# Altium PCB m_tas3_4layer.PcbDoc (part 1 of 2)
Units mm, origin at the board's own origin, x right, y up, seen from the top; angles counter-clockwise.
Board outline 100.71 x 81.15 mm, 4 copper layers (Top Layer, PWR, GND, Bottom Layer), stack 0.603 mm thick; 79 components, 40 nets, 216 pads, 95 vias.
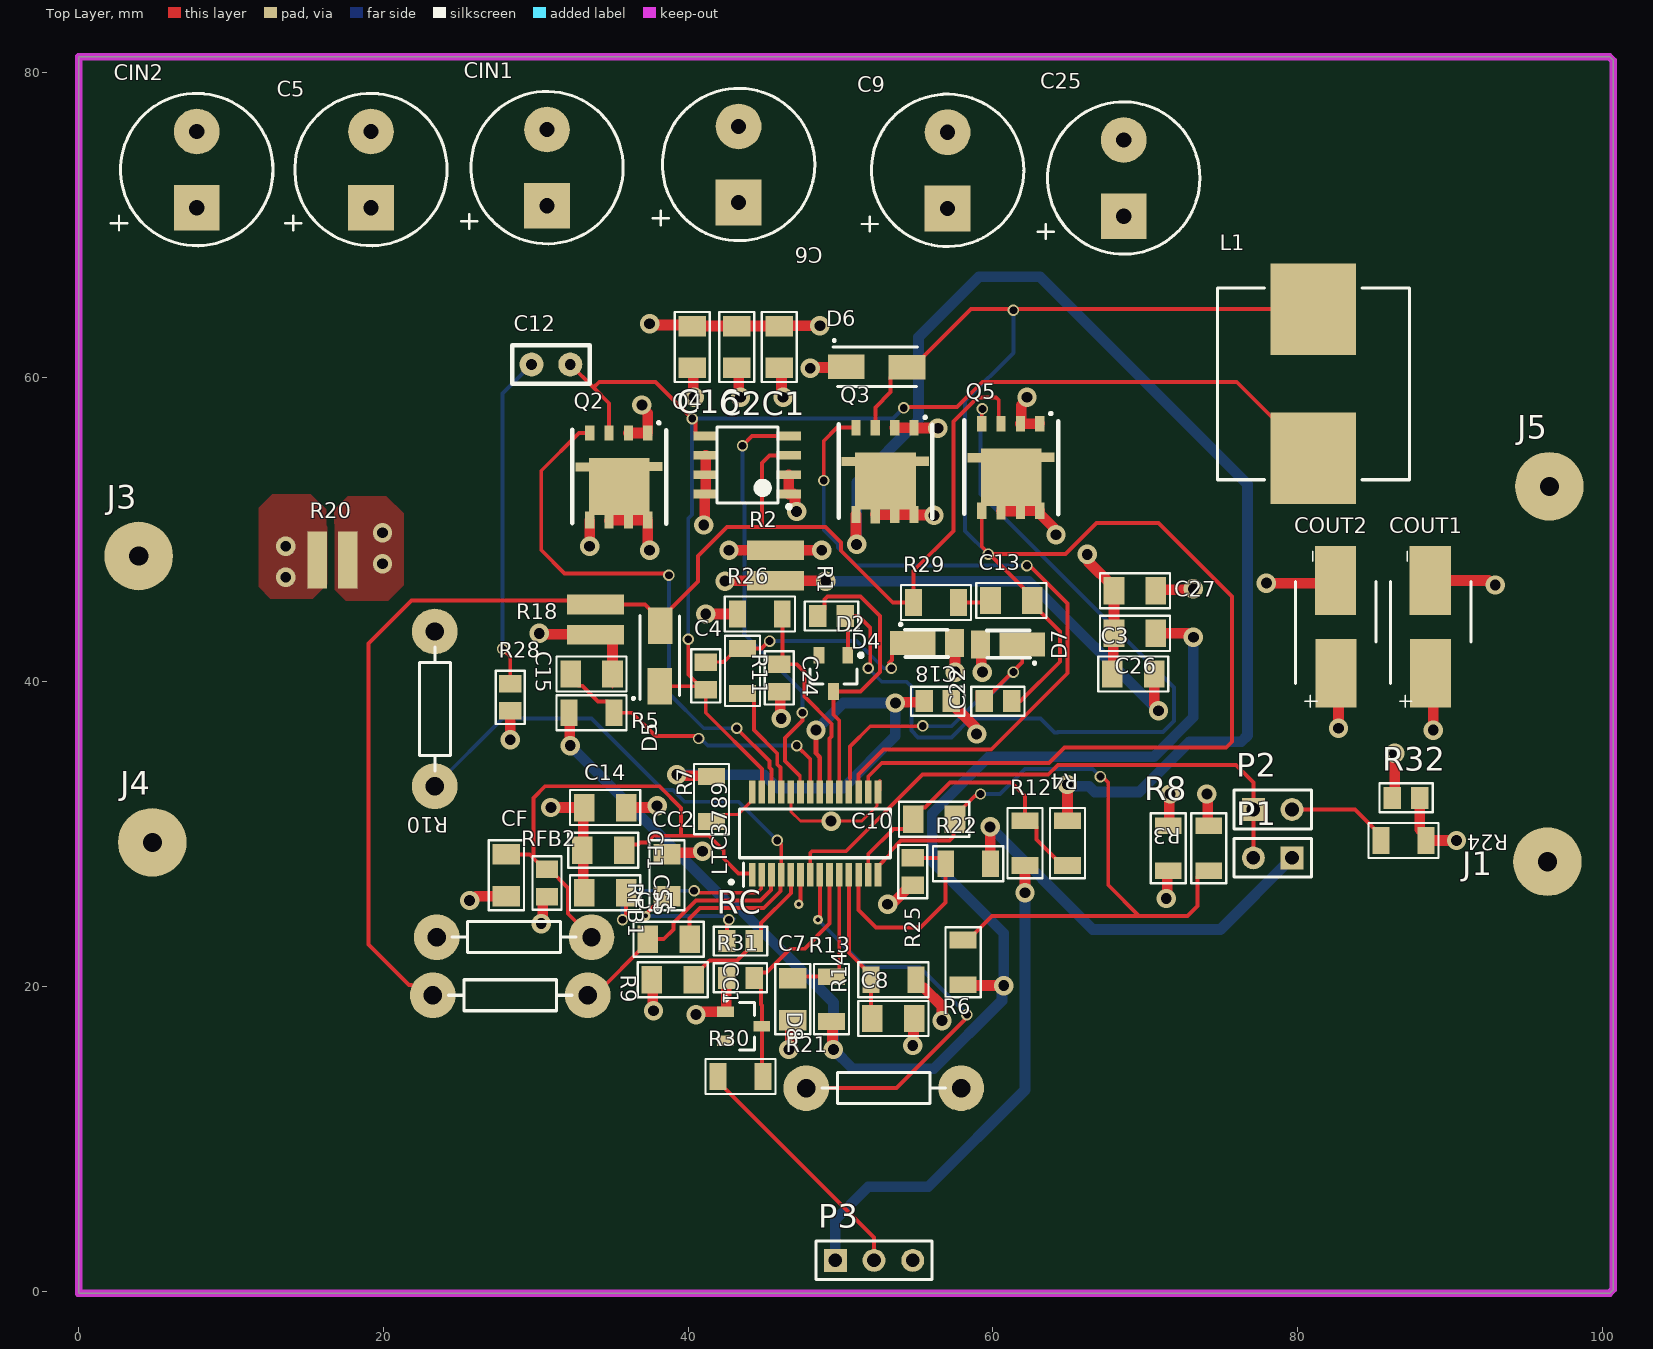
[diagram p0: Top Layer view]
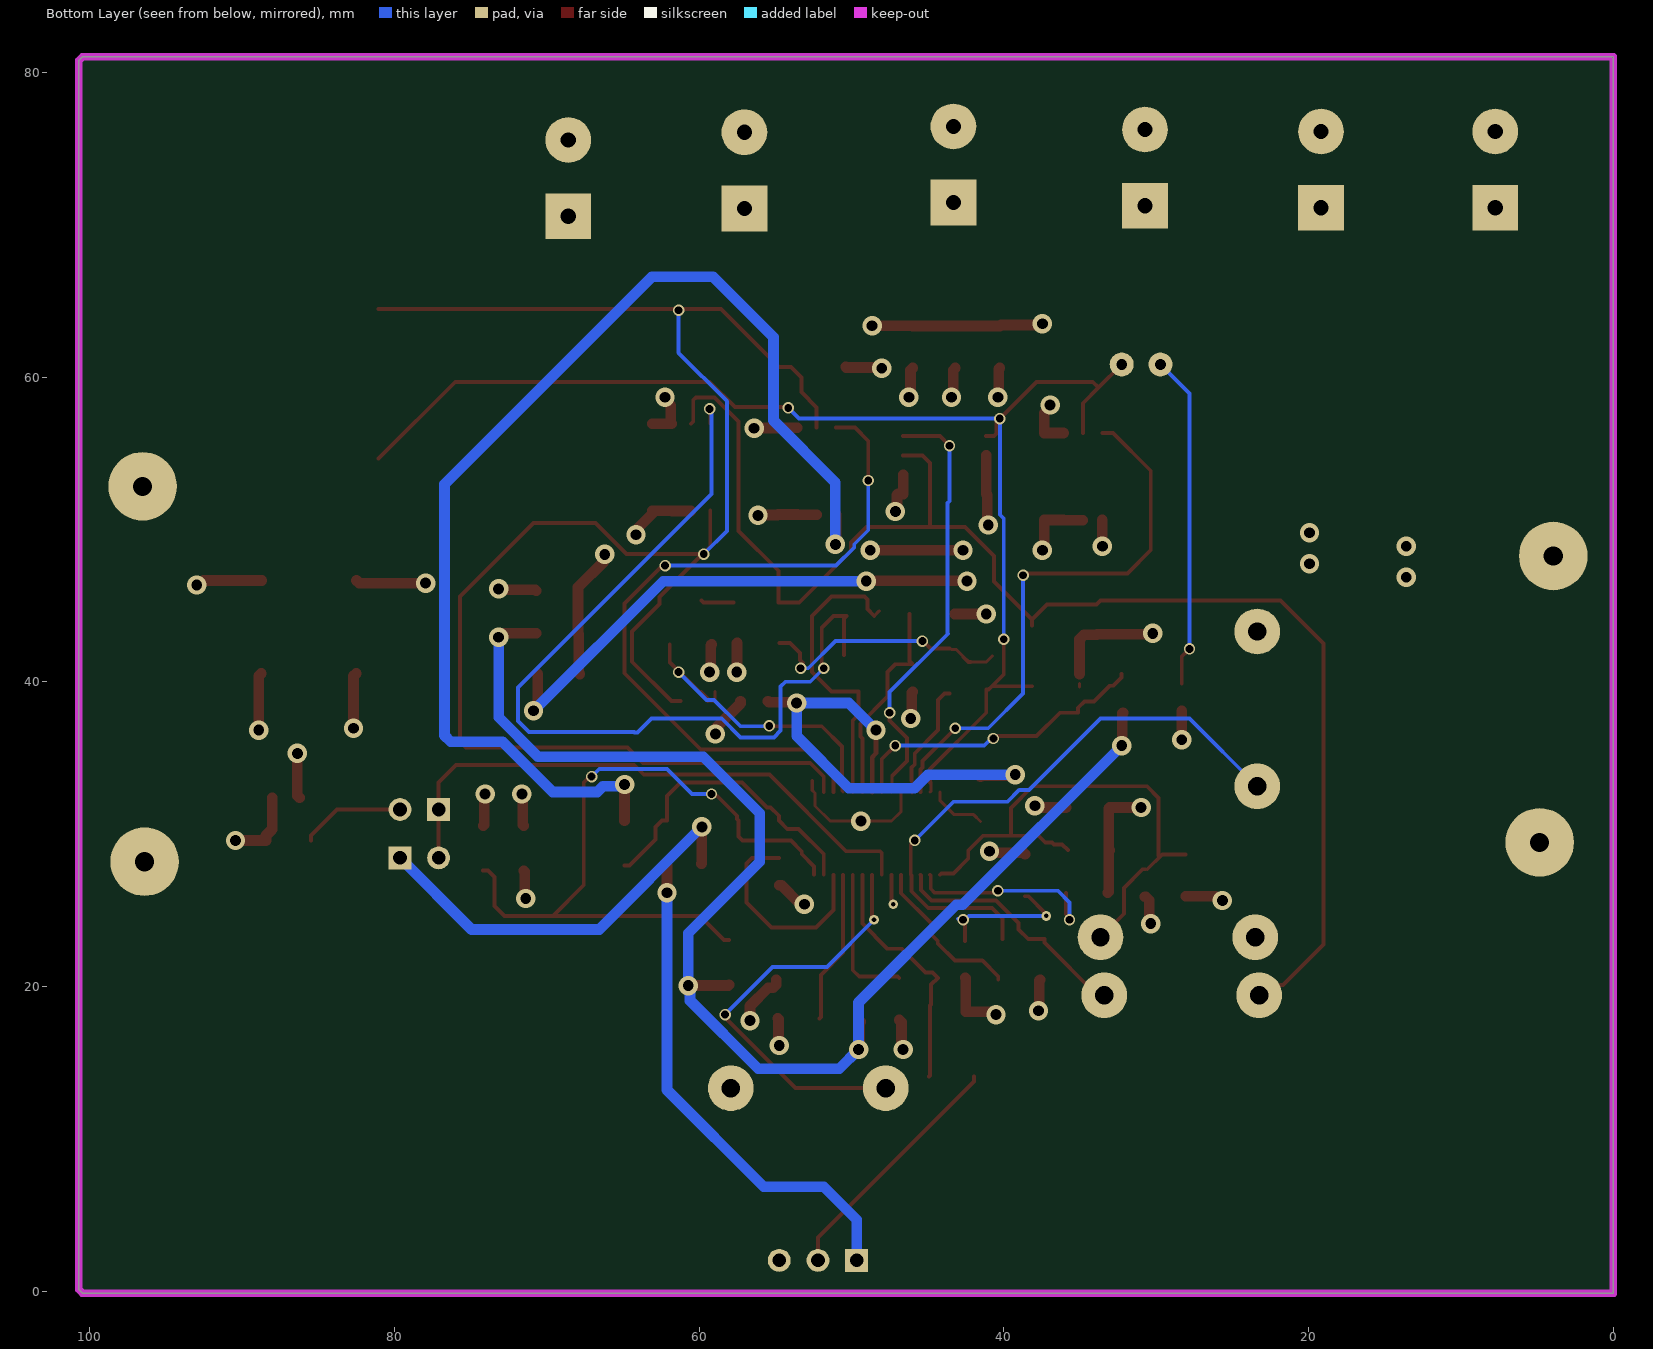
[diagram p1: Bottom Layer view, seen from below]
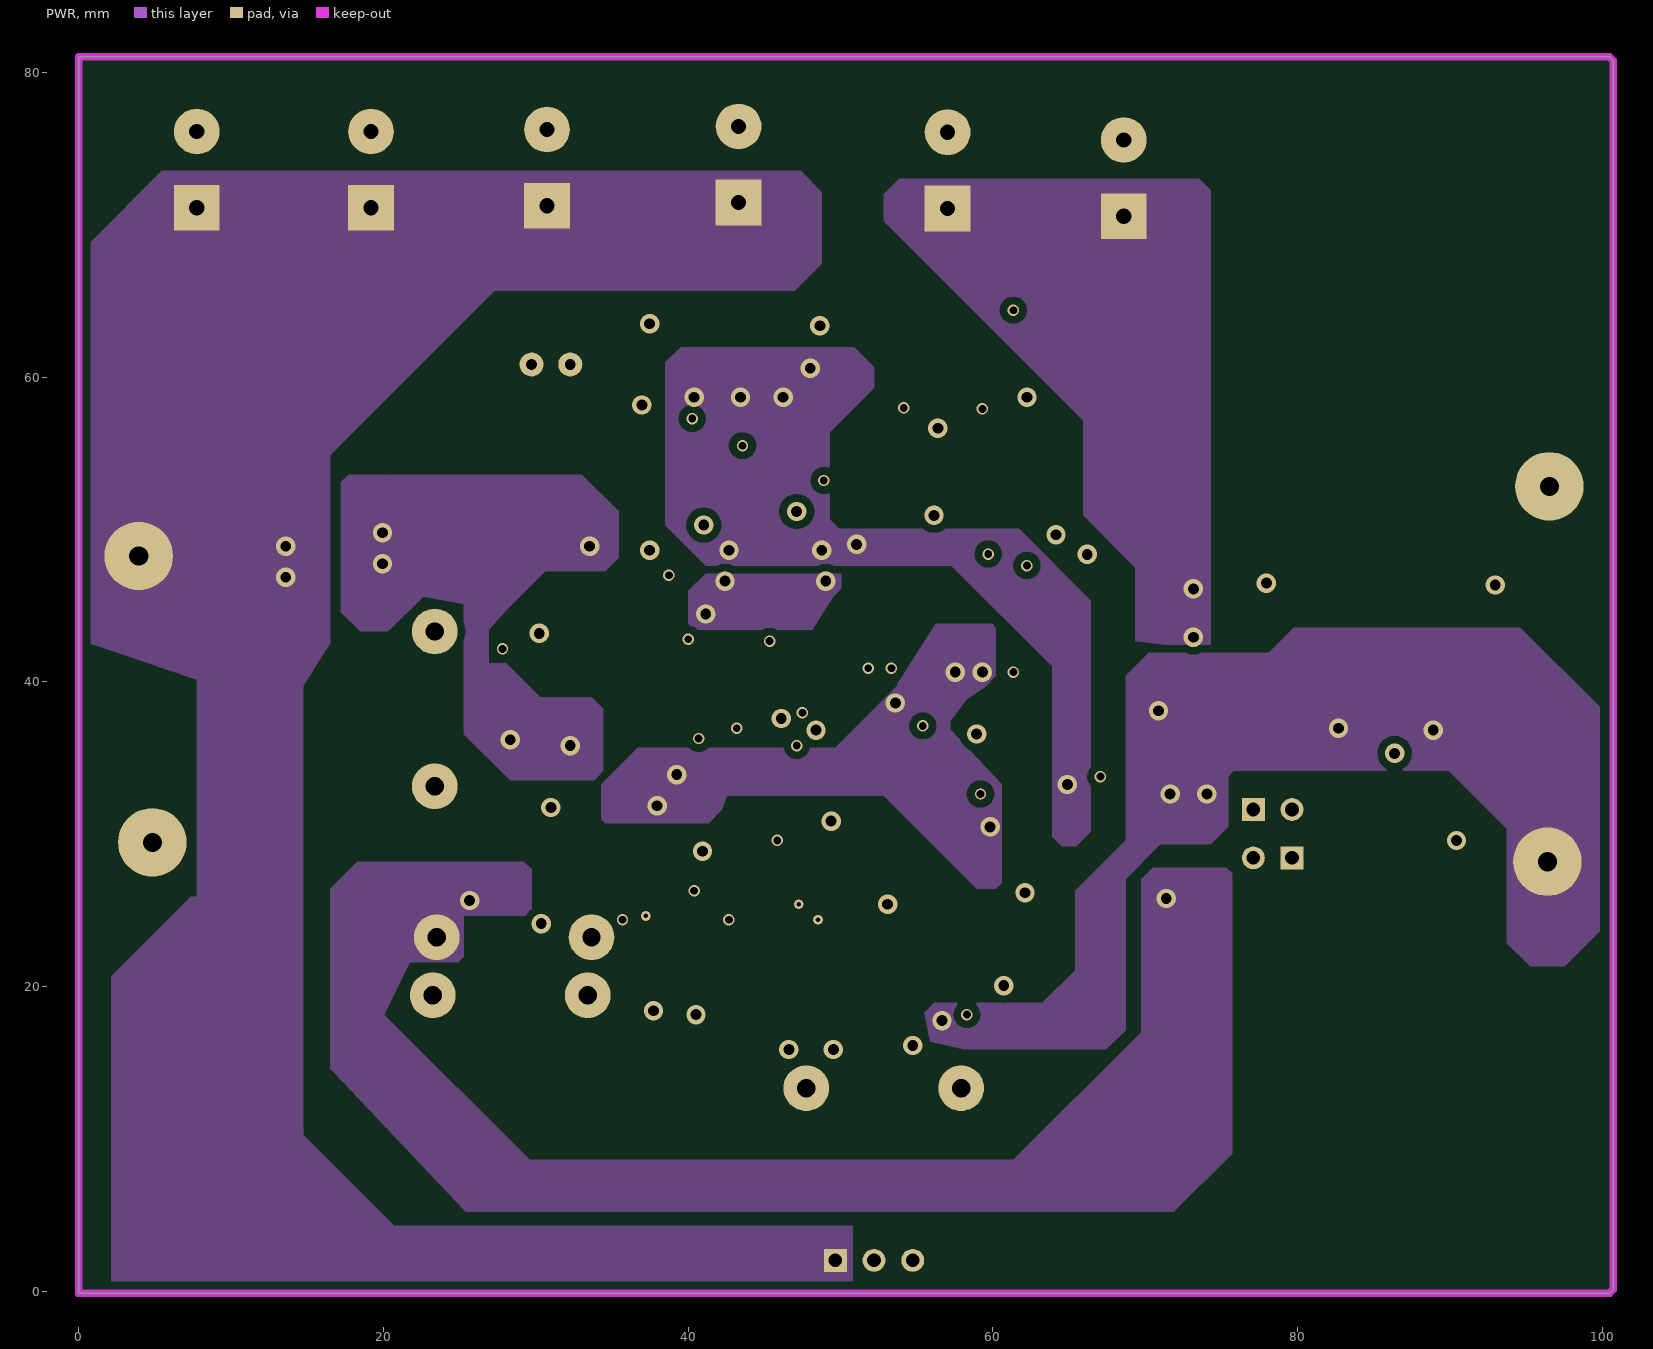
[diagram p2: PWR]
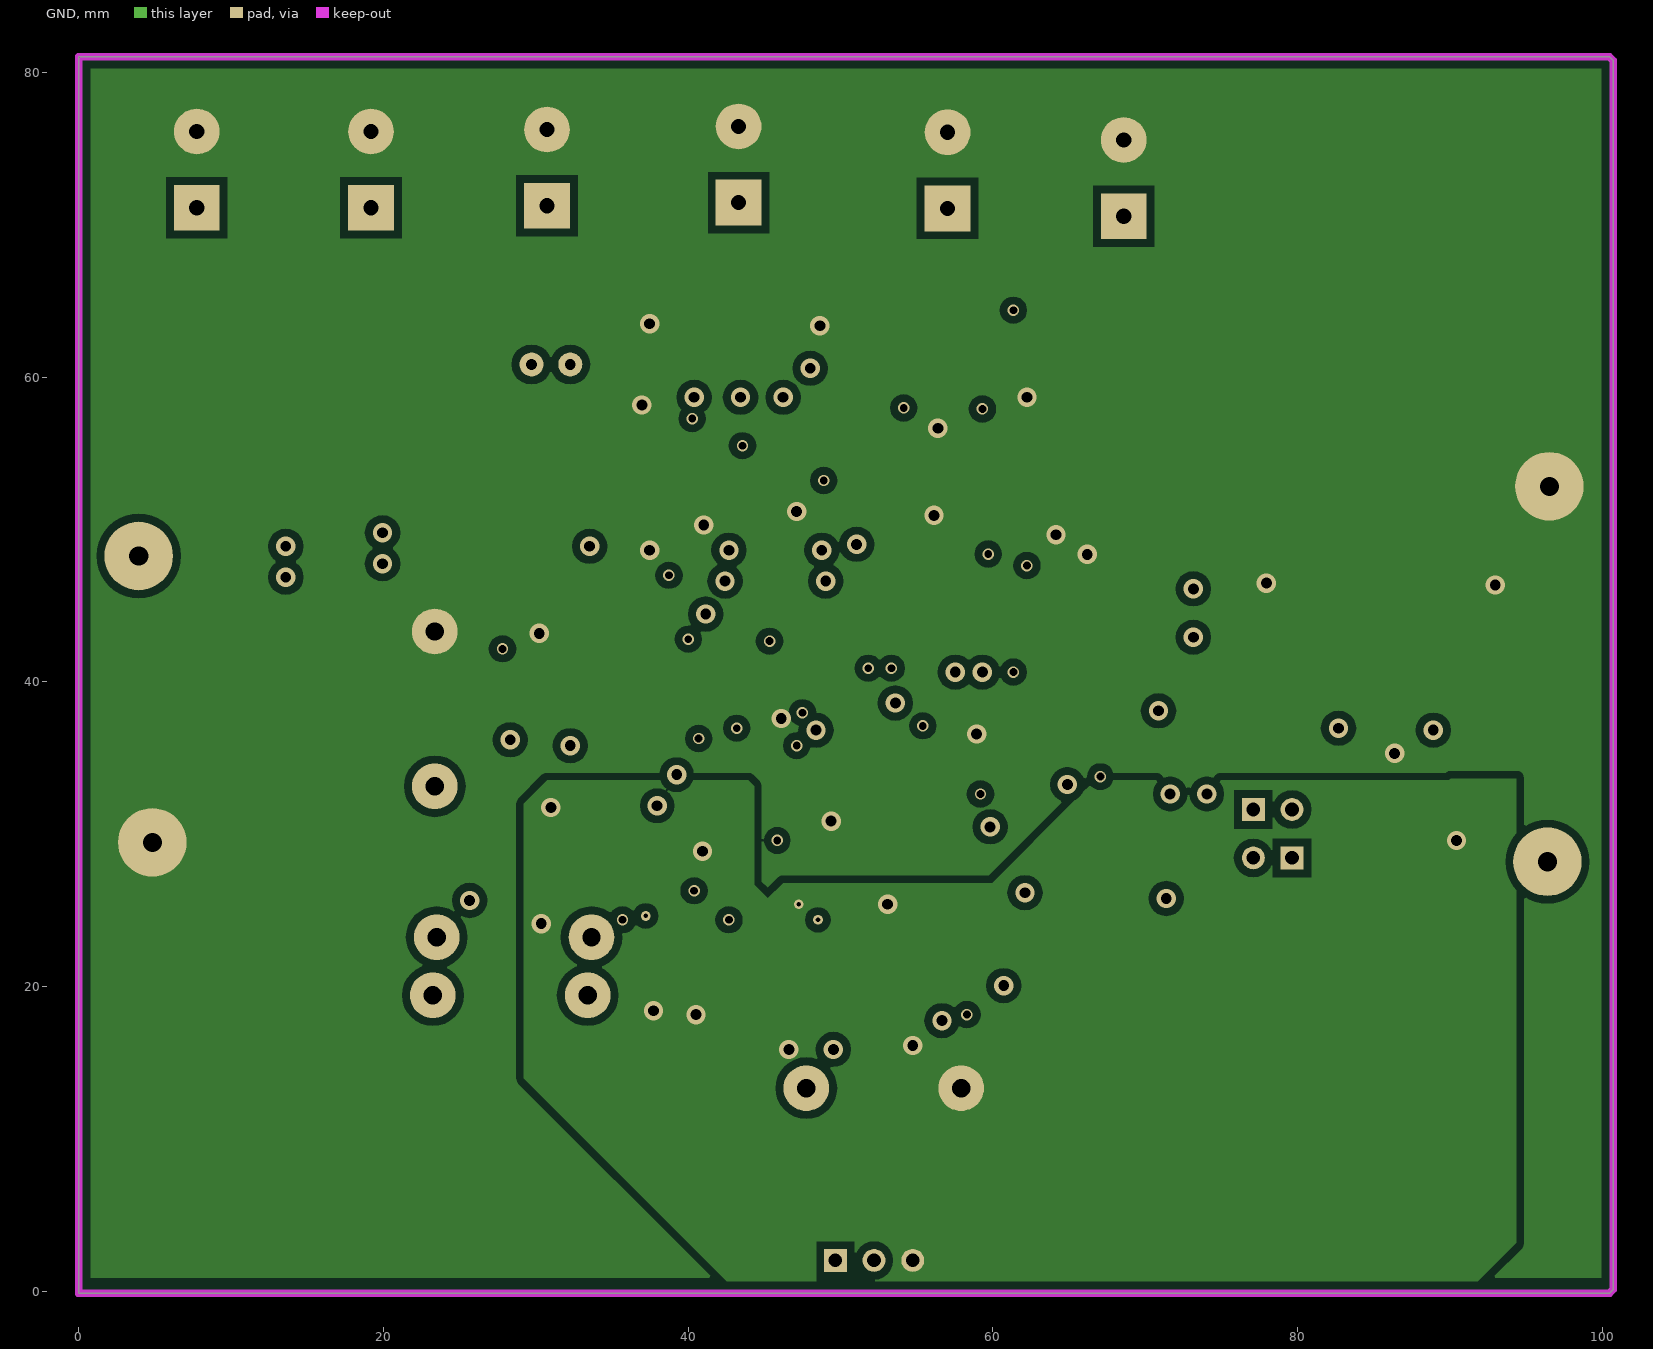
[diagram p3: GND]
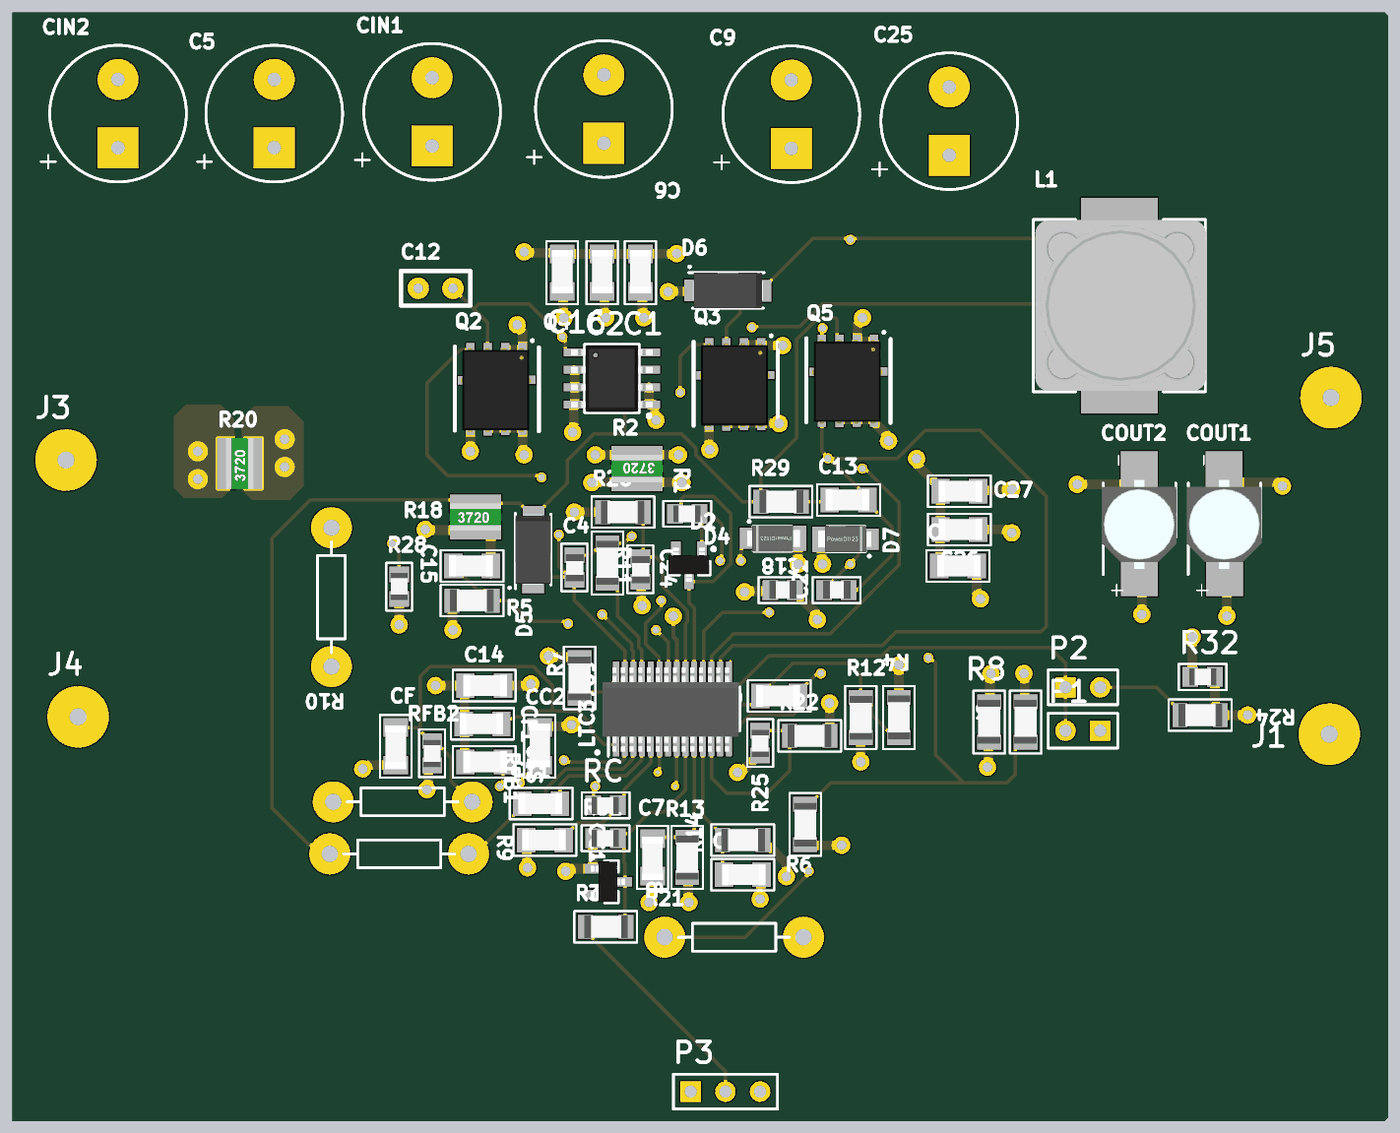
[diagram p4: 3D render of the assembled board from above, using the file's embedded part models]

## Layer stack, top to bottom
Top Solder: solder mask 0.0102, Solder Resist, Dk 3.5
Top Layer: signal copper 0.0356
Dielectric 2: prepreg 0.0711, PP-006, Dk 4.1
PWR: signal copper 0.035
Dielectric 1: dielectric 0.32, FR-4, Dk 4.8
GND: signal copper 0.035
Dielectric 3: prepreg 0.0711, PP-006, Dk 4.1
Bottom Layer: signal copper 0.0356
Bottom Solder: solder mask 0.0102, Solder Resist, Dk 3.5

## Board outline
0,-0.127 0,81.026 100.457,81.026 100.711,80.772 100.711,0.127 100.457,-0.127

## Design rules (kind name [scope] priority, off if disabled: settings)
Clearance Poly [InPoly] p1: gap=0.508 ignorepadtopadclearanceinfootprint=FALSE
Clearance [All] p2: gap=0.254 ignorepadtopadclearanceinfootprint=FALSE except(0: Arc-Hole Track-Hole SMDPad-Hole THPad-Hole Via-Hole Fill-Hole Poly-Hole Region-Hole Text-Hole)
PlaneConnect [All] p1: planeconnectstyle=Direct reliefexpansion=0.508 reliefentries=4 reliefconductorwidth=0.254 reliefairgap=0.254
PolygonConnect [All] p1: connectstyle=Direct reliefconductorwidth=0.254 reliefentries=4 polygonreliefangle="90 Angle" airgapwidth=0.254
RoutingVias [All] p1: holewidth=0.711 width=1.27 viastyle="Through Hole" minholewidth=0.711 minwidth=1.27 maxholewidth=0.711 maxwidth=1.27
SolderMaskExpansion [All] p1: expansion=0.102 istentingtop=FALSE
Width [All] p1: maxlimit=2.54 minlimit=0.254 preferedwidth=0.254
29 further rules are at their usual default settings.

## Components (designator, comment, footprint, x,y, rotation, side; value= is the part's Value field where it differs from the comment)
C1 "22uF" CAPC3216X190N(1206) 45.974,61.976 r270 top
C2 "22uF" CAPC3216X190N(1206) 43.18,61.976 r270 top
C3 "100nF opt" CAPC3216X190N(1206) 69.215,40.513 r180 top
C4 "220nF" CAPC2012X14N(0805) 41.148,40.397 r270 top value=100nF
C5 "3.3uF" RAD5X10X16 19.177,71.12 r90 top
C6 "3.3uF" RAD5X10X16 43.307,71.454 r90 top
C7 "100nF opt" CAPC3216X190N(1206) 46.863,19.177 r90 top
C8 "100nF opt" CAPC3216X190N(1206) 53.467,17.907 r180 top
C9 "3.3uF" RAD5X10X16 57.023,71.073 r90 top
C10 "2.2uF" CAPC3216X190N(1206) 56.134,30.988 r0 top
C11 "100nF opt" CAPC3216X190N(1206) 38.713,23.114 r0 top
C12 "390pF" 2.54X5.5MM 29.718,60.833 r0 top value=220pF
C13 "1800pF" CAPC3216X190N(1206) 61.214,45.339 r0 top
C14 "0.1uF" CAPC3216X190N(1206) 34.544,31.75 r180 top
C15 "1uF" CAPC3216X190N(1206) 33.655,40.513 r0 top
C16 "22uF" CAPC3216X190N(1206) 40.259,61.976 r270 top
C18 "10uF" CAPC2012X14N(0805) 56.377,38.735 r0 top value=100nF
C22 "220nF" CAPC2012X14N(0805) 60.325,38.735 r0 top value=100nF
C24 "1uF" CAPC2012X14N(0805) 45.974,40.259 r270 top value=100nF
C25 "3.3uF" RAD5X10X16 68.58,70.565 r90 top
C26 "100nF opt" CAPC3216X190N(1206) 69.32,43.18 r180 top
C27 "100nF opt" CAPC3216X190N(1206) 69.32,45.974 r180 top
CC1 "1nF" CAPC3216X190N(1206) 38.989,20.447 r0 top
CC2 "10nF" CAPC3216X190N(1206) 38.608,27.305 r270 top
CF "100nF opt" CAPC3216X190N(1206) 28.067,27.305 r90 top
CF1 "100nF opt" CAPC3216X190N(1206) 34.417,28.956 r0 top
CIN1 "270uF" RAD5X10X16 30.734,71.247 r90 top
CIN2 "opt" RAD5X10X16 7.747,71.12 r90 top
COUT1 "330uF" OSCON 89.027,44.577 r90 top
COUT2 "330uF opt" OSCON 82.804,44.577 r90 top
CSS "10nF" CAPC3216X190N(1206) 34.544,26.162 r180 top
D2 "BAS16" BZX5V1/SOT23 50.48,41.75 r270 top
D4 "DFLS160" DFLS160 56.212,41.82 r0 top
D5 "B240A" B240A 38.354,40.64 r90 top
D6 "B240A" B240A 51.308,60.452 r0 top
D7 "DFLS160" DFLS160 60.452,43.18 r180 top
D8 "BZX5V1" BZX5V1/SOT23 42.451,18.349 r0 top
J1 "VOUT" I/O 96.393,28.194 r0 top
J3 "VIN" I/O 3.937,48.26 r0 top
J4 "GND" I/O 4.826,29.464 r0 top
J5 "GND" I/O 96.52,52.832 r0 top
L1 "4.7uH" 4.7UH 81.026,59.563 r90 top
LTC3789 "LTC3789" LTC3789 44.299,26.604 r90 top
P1 "Header 2" HDR1X2 79.629,28.448 r180 top
P2 "Header 2" HDR1X2 77.089,31.623 r0 top
P3 "Header 3" HDR1X3 49.657,2.032 r0 top
Q2 "Si7884" MOSFET 33.472,54.702 r270 top
Q3 "SIR410" MOSFET 50.945,55.058 r270 top
Q4 "Si4840" SOIC-8-SI4840 47.159,52.424 r180 top
Q5 "SIR410" MOSFET 59.2,55.312 r270 top
R1 "5.6" RESC2013X70N(0805) 49.403,44.323 r180 top
R2 "0.01" SUSUMU 43.97,46.466 r90 top
R3 "100" RESC3216X84N(1206) 74.168,29.083 r90 top value=100K
R4 "100" RESC3216X84N(1206) 64.897,29.415 r90 top value=100K
R5 "15" RESC3216X84N(1206) 33.655,37.973 r180 top value=100K
R6 "10 opt" RESC3216X84N(1206) 58.039,21.59 r270 top value=100K
R7 "100K" RESC3216X84N(1206) 41.529,32.307 r270 top
R8 "10" RESC3216X84N(1206) 71.501,29.083 r90 top value=100K
R9 "1.2K" AXIAL0.4 23.241,19.431 r0 top
R10 "1.2K" AXIAL0.4 23.368,43.307 r270 top
R11 "10" RESC3216X84N(1206) 43.561,40.718 r90 top value=100K
R12 "10 opt" RESC3216X84N(1206) 62.103,29.415 r270 top value=100K
R13 "100" RESC3216X84N(1206) 49.403,19.177 r270 top value=100K
R14 "100" RESC3216X84N(1206) 53.467,20.447 r0 top value=100K
R18 "0.01" SUSUMU 35.659,45.26 r270 top
R20 "0.004" SUSUMU 15.478,49.756 r0 top
R21 "121K" AXIAL0.4 57.912,13.335 r180 top
R22 "10 opt" RESC3216X84N(1206) 58.371,28.067 r180 top value=100K
R24 "10K" RESC3216X84N(1206) 86.946,29.591 r0 top value=100K
R25 "0" RESC2013X70N(0805) 54.737,27.548 r270 top
R26 "10" RESC3216X84N(1206) 44.704,44.45 r180 top value=100K
R28 "5.6" RESC2013X70N(0805) 28.321,38.989 r90 top
R29 "3.6" RESC3216X84N(1206) 56.261,45.212 r0 top value=100K
R30 "33K" RESC3216X84N(1206) 43.434,14.097 r0 top value=100K
R31 "12.1K" RESC2013X70N(0805) 43.423,20.574 r180 top
R32 "0" RESC2013X70N(0805) 87.122,32.385 r0 top
RC "14.7K" RESC2013X70N(0805) 43.434,22.987 r180 top
RFB1 "113K" AXIAL0.4 23.495,23.241 r0 top
RFB2 "8.2K" RESC2013X70N(0805) 30.734,26.797 r270 top

## Footprints (in the part's own frame and the unit in brackets; to place one, negate y for a bottom-side part, rotate by r counter-clockwise, add the part's x,y. Pads: shape width x height; smd on the part's side, far side on the other; paste and mask are expansions set on the pad)
2.54X5.5MM [mil] "Body 5X2.54mm, Pitch:2.54mm"
  round 62 hole 28: 1(0,0) 2(100,0)
  silkscreen extent -50,-50 150,50
4.7UH [mm] "Precision Wire Wound Inductor, 2-Leads, Body 12,60x10,00mm, IPC Medium Density"
  rect 6x5.6 smd: 1(-4.9,0) 2(4.9,0)
  silkscreen extent -6.3,-6.3 6.3,6.3, body extent -6.25,-6.35 6.25,6.15, height 6
AXIAL0.4 [mm] "body:3.5 X 10 mm( D  x L ) Pitch:10.16 mm (400mil)"
  round 3 hole 1.2: 1(0,0) 2(10.16,0)
  silkscreen extent 1.02,-1.02 9.14,1.02
B240A [mm]
  rect 2.4x1.6 smd: 1(-0.93,0.225) 2(3.05,0.2)
  silkscreen extent -1.8,-1.08 3.72,1.99, body extent -1.52,-1.08 3.67,1.53, height 2.3
BZX5V1/SOT23 [mm] "SOT23, 3-Leads, Body 2,95x2,48mm, Pitch 0,95mm, IPC Medium Density"
  rect 1.1x0.7 smd: 1(0,0) 2(0,-1.9) 3(2.38,-0.95)
  silkscreen extent -0.12,-2.5 1.91,0.98, body extent -0.1,-2.45 2.4,0.55, height 1.05
CAPC2012X14N(0805) [mm] "Chip Capacitor, 2-Leads, Body 2,00x1,25mm, IPC Medium Density"
  rect 1.15x1.45 smd: 1(-0.9,0) 2(0.9,0)
  silkscreen extent -1.75,-0.95 1.75,0.95, body extent -0.97,-0.63 1.02,0.68, height 0.73
CAPC3216X190N(1206) [mm] "Chip Capacitor, 2-Leads, Body 3,20x1,60mm, IPC Medium Density"
  rect 1.35x1.8 smd: 1(-1.375,0) 2(1.375,0)
  silkscreen extent -2.3,-1.15 2.3,1.15, body extent -1.67,-0.78 1.53,0.78, height 1.83
DFLS160 [mm]
  rect 2.99x1.56 smd: 1(-1.475,0.725)
  rect 1.25x1.85 smd: 2(1.275,0.725)
  silkscreen extent -2.32,-0.2 0.85,2, body extent -2.42,-0.26 1.45,1.67, height 1.25
HDR1X2 [mm] "Connector; Header; 2 Position"
  rect 1.5x1.5 hole 0.9: 1(0,0)
  round 1.5 hole 0.9: 2(2.54,0)
  silkscreen extent -1.27,-1.27 3.81,1.27
HDR1X3 [mm] "Connector; Header; 3 Position"
  rect 1.5x1.5 hole 0.9: 1(0,0)
  round 1.5 hole 0.9: 2(2.54,0) 3(5.08,0)
  silkscreen extent -1.27,-1.27 6.35,1.27
I/O [mm]
  round 4.5 hole 1.25: 1(0,0)
LTC3789 [mm]
  rect 1.526x0.435 smd: 1(0.738,0.103) 2(0.738,-0.533) 3(0.738,-1.167) 4(0.738,-1.803) 5(0.738,-2.437) 6(0.738,-3.073) 7(0.738,-3.707) 8(0.738,-4.343) 9(0.738,-4.977) 10(0.738,-5.613) 11(0.738,-6.247) 12(0.738,-6.883) 13(0.738,-7.517) 14(0.738,-8.153) 15(6.162,-8.153) 16(6.162,-7.517) 17(6.162,-6.883) 18(6.162,-6.247) 19(6.162,-5.613) 20(6.162,-4.977) 21(6.162,-4.343) 22(6.162,-3.707) 23(6.162,-3.073) 24(6.162,-2.437) 25(6.162,-1.803) 26(6.162,-1.167) 27(6.162,-0.533) 28(6.162,0.103)
  silkscreen extent -0.02,-8.97 5.05,1.58, body extent 0.3,-8.88 6.49,1.1, height 1.75
MOSFET [mm]
  rect 1x0.61 smd: 1(-1.625,3.875) 2(-1.625,2.605) 3(-1.625,1.335) 4(-1.625,0.065)
  rect 1.1x0.61 smd: 5(4.075,0.065) 6(4.1,1.335) 7(4.075,2.605) 8(4.075,3.875)
  rect 0.61x1.1 smd: ""(0.575,4.3) ""(0.6,-0.325)
  rect 3.76x3.98 smd: ""(1.875,2)
  silkscreen extent -2.35,-1.08 4.33,5.07, body extent -1.75,-0.65 4.4,4.5, height 1.04
OSCON [mm]
  rect 4.5x2.7 smd: 1(-4.025,0.3) 2(2.075,0.325)
  silkscreen extent -6.25,-2.35 4,2.95, body extent -4.27,-2.42 2.23,3.08, height 5.5
RAD5X10X16 [mm] "Capacitor, Electrolytic, Radial; Body 10 x 16 mm (Dia.xL typ); Pin Spacing 5 mm (typ)"
  rect 3x3 hole 1: 1(0,0)
  round 3 hole 1: 2(5,0)
  silkscreen extent -2.5,-5 7.5,5.64
RESC2013X70N(0805) [mm] "Chip Resistor, 2-Leads, Body 2,00x1,25mm, IPC Medium Density"
  rect 1.15x1.45 smd: 1(-0.9,0) 2(0.9,0)
  silkscreen extent -1.75,-0.95 1.75,0.95, body extent -0.97,-0.63 1.03,0.63, height 0.43
RESC3216X84N(1206) [mm] "Chip Resistor, 2-Leads, Body 3,20x1,60mm, IPC Medium Density"
  rect 1.1x1.75 smd: 1(-1.475,0) 2(1.475,0)
  silkscreen extent -2.3,-1.15 2.3,1.15, body extent -1.58,-0.83 1.62,0.83, height 0.53
SOIC-8-SI4840 [mm] "SOIC, 8-Leads, Body 4,90x3,90mm, Pitch 1,27mm, IPC Medium Density"
  rect 1.6x0.57 smd: 1(0.55,0.1) 2(0.55,-1.17) 3(0.55,-2.44) 4(0.55,-3.71) 5(6,-3.71) 6(6,-2.44) 7(6,-1.17) 8(6,0.1)
  silkscreen extent 0.42,-4.31 5.27,1.06, body extent 0.27,-4.31 6.27,0.69, height 1.75
SUSUMU [mm]
  rect 1.3x3.75 smd: 1(0.175,-1.75) 2(2.175,-1.75)
  body extent 0.17,-3.62 2.17,0.12, height 1

## Part data
C1 C2 C3 C7 C8 C10 C11 C13 C14 C15 C16 C26 C27 CC1 CC2 CF CF1 CSS: library part VJ1206G475KXQTW1BC, "CAPACITOR CERAMIC, 4.7UF, 10V, X5R, 10%, 1206, FULL REEL; Product Range:VJ?W1BC Series; Capacitance:4.7 F; Capacitance Tolerance: 10%; Dielectric Characteristic:X5R; Voltage Rating:10V; Ceramic Capacitor Case:1206 [3216 Metric] ;RoHS Compliant: Yes", Capacitance=4.7uF, Case Code (Metric)=3216, Case Code (Imperial)=1206, Dielectric=X5R, Dielectric Material=Tantalum, Manufacturer="Vishay Vitramon", Max Operating Temperature=85°C, Min Operating Temperature=-55°C, Package Quantity=2000, Supplier Part Number 1=77-VJ1206G475KXQTBC, Tolerance=10%, Voltage Rating (DC)=10V, Case/Package=1206, Category="Ceramic Capacitors", Component=43, ComponentLink1Description=https://datasheet.ciiva.com/11487/vjw1bcbascomseries-11487630.pdf?src-supplier=Avnet, ComponentLink1URL=https://datasheet.ciiva.com/11487/vjw1bcbascomseries-11487630.pdf?src-supplier=Avnet, Depth=1.6mm, Height=1.9mm, Lead Free="Lead Free", Length=3.2mm, Manufacturer Part Number=VJ1206G475KXQTW1BC, Mount="Surface Mount", Number of Pins=2, Packaging="Tape and Reel", Pricing 1="1=0,44000, 50=0,37200, 100=0,30800, 500=0,29900, 1000=0,29900, 2000=0,26000 (USD)", RoHS=Yes, Stock 1=1681, Supplier 1=Mouser, Termination=SMD/SMT, Width=1.6mm
C4 C18 C22 C24: library part "CAP CER 100NF", "TDK - CGA3E2X7R1H104K080AA. - CERAMIC CAPACITOR, 0.1UF, 50V, X7R, 0603, FULL REEL", Capacitance=100nF, Case Code (Metric)=1608, Case Code (Imperial)=0603, Dielectric=X7R, Manufacturer=TDK, Max Operating Temperature=125°C, Min Operating Temperature=-55°C, Package Quantity=1, Ratings=AEC-Q200, Supplier Part Number 1=810-CGA3E2X7R1H104K, Tolerance=10%, Voltage=50V, Case/Package=0603, Category="Ceramic Capacitors", Component=8, ComponentLink1Description=https://datasheet.ciiva.com/24216/cga3e2x7r1h104k080aa-266291-24216208.pdf?src-supplier=Mouser, ComponentLink1URL=https://datasheet.ciiva.com/24216/cga3e2x7r1h104k080aa-266291-24216208.pdf?src-supplier=Mouser, ComponentLink2Description=https://datasheet.ciiva.com/15192/getdatasheetpartid-715867-15192412.pdf?src-supplier=Verical, ComponentLink2URL=https://datasheet.ciiva.com/15192/getdatasheetpartid-715867-15192412.pdf?src-supplier=Verical, ComponentLink3Description=https://datasheet.ciiva.com/16500/mlccspec-automotive-general-midvoltage-en-16500693.pdf?src-supplier=Future+Electronics, ComponentLink3URL=https://datasheet.ciiva.com/16500/mlccspec-automotive-general-midvoltage-en-16500693.pdf?src-supplier=Future+Electronics, ComponentLink4Description=https://datasheet.ciiva.com/22725/1735392-22725642.pdf?src-supplier=Element14, ComponentLink4URL=https://datasheet.ciiva.com/22725/1735392-22725642.pdf?src-supplier=Element14, ComponentLink5Description=https://datasheet.ciiva.com/23803/1936565-23803084.pdf?src-supplier=Newark, ComponentLink5URL=https://datasheet.ciiva.com/23803/1936565-23803084.pdf?src-supplier=Newark, ComponentLink6Description=https://datasheet.ciiva.com/46385/1735392-46385708.pdf?src-supplier=Element14, ComponentLink6URL=https://datasheet.ciiva.com/46385/1735392-46385708.pdf?src-supplier=Element14, ComponentLink7Description=http://www.mouser.com/ds/2/212/KEM_C1012_X7R_OPENMODE_SMD-1103265.pdf?src-supplier=Mouser, ComponentLink7URL=http://www.mouser.com/ds/2/212/KEM_C1012_X7R_OPENMODE_SMD-1103265.pdf?src-supplier=Mouser, ComponentLink8URL=https://search.kemet.com/component-edge/download/datasheet/C0805F104K4RACTU.pdf?src-supplier=Digi-Key, Composition=Ceramic, Depth=0.8mm, Features="Soft Termination", Height=0.8mm, Lead Free="Lead Free", Length=1.6mm, Manufacturer Part Number="CAP CER 100NF", Mount="Surface Mount", Packaging="Tape and Reel", Pricing 1="1=0,11000, 10=0,07900, 100=0,03500, 500=0,02500, 1000=0,01900, 4000=0,01300 (USD)", Radiation Hardening=No, REACH SVHC="No SVHC", RoHS=Yes, Stock 1=5553529, Supplier 1=Mouser, Termination=SMD/SMT, Thickness=0.035inch, Voltage Rating=50V, Voltage Rating (DC)=50V, Weight=7.1E-05oz, Width=0.8mm
C5 C6 C9 C25 CIN1 CIN2: library part "CAP EL 470UF", "ALUMINUM ELECTROLYTIC CAPACITOR 100UF, 63V, 20%, RADIAL, FULL REEL; Product Range:VR Series; Capacitance:100 F; Capacitance Tolerance: 20%; Voltage Rating:63V; Diameter:10mm; Capacitor Terminals:Radial Leaded; Packaging:Tape & Reel ;RoHS Compliant: Yes", Capacitance=100uF, Case/Package=Radial, Leakage Current=189uA, Manufacturer=Nichicon, Max Operating Temperature=85°C, Min Operating Temperature=-40°C, Package Quantity=500, Ripple Current=300mA, Supplier Part Number 1=UVR1J101MPD1TD, Tolerance=20%, Voltage=63V, Category="Aluminum Electrolytic Capacitors", Component=18, ComponentLink1Description=https://datasheet.ciiva.com/11685/e-vr-11685845.pdf?src-supplier=Avnet, ComponentLink1URL=https://datasheet.ciiva.com/11685/e-vr-11685845.pdf?src-supplier=Avnet, ComponentLink2Description=https://datasheet.ciiva.com/103/e-vr-103352.pdf?src-supplier=Digi-Key, ComponentLink2URL=https://datasheet.ciiva.com/103/e-vr-103352.pdf?src-supplier=Digi-Key, ComponentLink3Description=https://datasheet.ciiva.com/14603/70187464-14603353.pdf?src-supplier=Allied+Electronics, ComponentLink3URL=https://datasheet.ciiva.com/14603/70187464-14603353.pdf?src-supplier=Allied+Electronics, ComponentLink4Description=https://datasheet.ciiva.com/16392/e-vr-16392921.pdf?src-supplier=Future+Electronics, ComponentLink4URL=https://datasheet.ciiva.com/16392/e-vr-16392921.pdf?src-supplier=Future+Electronics, ComponentLink5Description=https://datasheet.ciiva.com/46381/1758668-46381770.pdf?src-supplier=Element14, ComponentLink5URL=https://datasheet.ciiva.com/46381/1758668-46381770.pdf?src-supplier=Element14, ComponentLink6Description=https://datasheet.ciiva.com/17354/e-vr-17354940.pdf?src-supplier=Avnet+Europe, ComponentLink6URL=https://datasheet.ciiva.com/17354/e-vr-17354940.pdf?src-supplier=Avnet+Europe, ComponentLink7Description=https://datasheet.ciiva.com/7907/e-vr-7907502.pdf?src-supplier=Element14, ComponentLink7URL=https://datasheet.ciiva.com/7907/e-vr-7907502.pdf?src-supplier=Element14, Diameter=10mm, Dissipation Factor=0.1%, Height=12.5mm, Height - Seated (Max)=0.492inch, Lead Diameter=0.6mm, Lead Pitch=5mm, Length=12.5mm, Life (Hours)=2000Hour, Manufacturer Part Number="CAP EL 470UF", Mount="Through Hole,PCB", Number of Pins=2, Packaging="Tape and Reel", Pricing 1="1=0,21830, 10=0,14660, 25=0,05930, 100=0,05410, 2000=0,07080, 6000=0,06440 (USD)", Radiation Hardening=No, REACH SVHC="No SVHC", RoHS=Yes, Stock 1=105, Supplier 1=Arrow, Termination=Radial, Voltage Rating=63V, Voltage Rating (DC)=63V
C12: library part "CAP CER DISC 220PF", "KEMET 220pF Multilayer Ceramic Capacitor (MLCC) 500 V dc 10% X7R dielectric C SMT max op. temp. +125C", Capacitance=220pF, Case Code (Metric)=2012, Case Code (Imperial)=0805, Dielectric=X7R, Dielectric Material=Ceramic, Manufacturer=KEMET, Max Operating Temperature=125°C, Min Operating Temperature=-55°C, Package Quantity=1, Supplier Part Number 1=80-C0805C221KCR, Tolerance=10%, Voltage=500V, Case/Package=0805, Category="Ceramic Capacitors", Component=2, ComponentLink1Description=https://datasheet.ciiva.com/14606/70096142-14606492.pdf?src-supplier=Allied+Electronics, ComponentLink1URL=https://datasheet.ciiva.com/14606/70096142-14606492.pdf?src-supplier=Allied+Electronics, Depth=1.2mm, Dissipation Factor=2.5%, Height=1.25mm, Length=2mm, Manufacturer Part Number="CAP CER DISC 220PF", Mount="Surface Mount,PCB", Number of Pins=2, Packaging="Tape and Reel", Pricing 1="1=0,37000, 10=0,21600, 100=0,15700, 500=0,13900, 1000=0,11800, 2500=0,09500 (USD)", RoHS=Yes, Stock 1=17842, Supplier 1=Mouser, Termination=SMD/SMT, Thickness=0.055inch, Voltage Rating=500V, Voltage Rating (DC)=500V, Width=0.049inch
COUT1 COUT2: library part 16SEPC180MX, "CAP ALUM POLY 180UF 20% 16V T/H", Capacitance=180uF, Case/Package=Radial, ESR (Equivalent Series Resistance)=10mR, Leakage Current=576uA, Manufacturer=Panasonic, Max Operating Temperature=105°C, Min Operating Temperature=-55°C, Package Quantity=200, Ripple Current=5A, Supplier Part Number 1=P16295-ND, Tolerance=20%, Voltage=16V, Category="Polymer Capacitors", Component=58, ComponentLink1Description=https://datasheet.ciiva.com/25746/1734355-25746218.pdf?src-supplier=Farnell, ComponentLink1URL=https://datasheet.ciiva.com/25746/1734355-25746218.pdf?src-supplier=Farnell, ComponentLink2Description=https://datasheet.ciiva.com/24068/sepc-os-262388-24068492.pdf?src-supplier=Mouser, ComponentLink2URL=https://datasheet.ciiva.com/24068/sepc-os-262388-24068492.pdf?src-supplier=Mouser, ComponentLink3Description=https://datasheet.ciiva.com/22746/1734355-22746349.pdf?src-supplier=Element14, ComponentLink3URL=https://datasheet.ciiva.com/22746/1734355-22746349.pdf?src-supplier=Element14, Diameter=8mm, Dissipation Factor=10%, Height=9mm, Height - Seated (Max)=0.354inch, Lead Diameter=0.6mm, Lead Pitch=3.5mm, Length=9mm, Life (Hours)=5000Hour, Manufacturer Part Number=16SEPC180MX, Mount="Through Hole", Number of Pins=9, Packaging=Bulk, Polarity=Polar, Pricing 1="1=1,03000, 10=0,78500, 50=0,65180, 100=0,56130, 500=0,43452, 1000=0,37417, 2500=0,35003, 5000=0,33193 (USD)", REACH SVHC="No SVHC", RoHS=Yes, Stock 1=64, Supplier 1=Digi-Key, Termination=Radial, Voltage Rating=16V, Voltage Rating (DC)=16V
D2 Q2 Q3 Q5: library part SIR410DP-T1-GE3, "MOSFET 20V 35A 36W", Continuous Drain Current (ID)=35A, Drain to Source Breakdown Voltage=20V, Drain to Source Resistance=5mR, Manufacturer="Vishay Siliconix", Max Operating Temperature=150°C, Max Power Dissipation=36W, Min Operating Temperature=-55°C, Package Quantity=1, Power Dissipation=4.2W, Supplier Part Number 1=SIR410DP-T1-GE3CT-ND, Threshold Voltage=1.2V, Input Capacitance=1.6nF, Category=MOSFETs, ComponentLink1Description=https://datasheet.ciiva.com/6376/sir410d-6376914.pdf?src-supplier=Digi-Key, ComponentLink1URL=https://datasheet.ciiva.com/6376/sir410d-6376914.pdf?src-supplier=Digi-Key, ComponentLink2Description=https://datasheet.ciiva.com/4438/sir410d-280000-4438492.pdf?src-supplier=Mouser, ComponentLink2URL=https://datasheet.ciiva.com/4438/sir410d-280000-4438492.pdf?src-supplier=Mouser, Drain to Source Voltage (Vdss)=20V, Element Configuration=Single, Fall Time=15ns, Gate to Source Voltage (Vgs)=20V, Height=1.04mm, Lead Free="Lead Free", Length=4.9mm, Manufacturer Part Number=SIR410DP-T1-GE3, Mount="Surface Mount", Number of Channels=1, Number of Pins=8, Packaging="Tape and Reel", Pricing 1="1=1,02000, 10=0,91500, 25=0,86800, 100=0,65100, 500=0,55180, 1000=0,44950 (USD)", Radiation Hardening=No, Rds On Max=4.8mR, REACH SVHC=Unknown, Rise Time=15ns, RoHS=Yes, Stock 1=7964, Supplier 1=Digi-Key, Turn-Off Delay Time=30ns, Turn-On Delay Time=25ns, Weight=0.01787oz, Width=5.89mm
  D2: Component=8, Number of Contacts=0, Number of Elements=0, Number of Positions=0, Number of Rows=0, Number of Unidirectional Channels=0
  Q2 Q3 Q5: Component=27, Number of Elements=1
D4 D7: library part DFLS160Q-7, "DIODE SCHOTTKY 60V 1A POWERDI123", Average Rectified Current=01:00:00, Forward Voltage=500mV, Manufacturer=Diodes, Max Forward Surge Current (Ifsm)=50A, Max Operating Temperature=150°C, Max Repetitive Reverse Voltage (Vrrm)=60V, Max Reverse Current=100uA, Min Operating Temperature=-65°C, Package Quantity=3000, Supplier Part Number 1=DFLS160Q-7DICT-ND, Category="Rectifier Diodes", Component=11, ComponentLink1Description=http://www.mouser.com/ds/2/115/DFLS160Q-335693.pdf?src-supplier=Mouser, ComponentLink1URL=http://www.mouser.com/ds/2/115/DFLS160Q-335693.pdf?src-supplier=Mouser, ComponentLink2Description=http://diodes.com/datasheets/DFLS160Q.pdf?src-supplier=Avnet, ComponentLink2URL=http://diodes.com/datasheets/DFLS160Q.pdf?src-supplier=Avnet, ComponentLink3Description=https://www.diodes.com/assets/Datasheets/DFLS160Q.pdf?src-supplier=Digi-Key, ComponentLink3URL=https://www.diodes.com/assets/Datasheets/DFLS160Q.pdf?src-supplier=Digi-Key, Element Configuration=Single, Forward Current=01:00:00, Manufacturer Part Number=DFLS160Q-7, Max Reverse Voltage (DC)=60V, Mount="Surface Mount", Number of Contacts=0, Number of Elements=0, Number of Pins=123, Number of Positions=0, Number of Rows=0, Number of Unidirectional Channels=0, Packaging="Tape and Reel", Pricing 1="1=0,66000, 10=0,58300, 100=0,39770, 500=0,33230, 1000=0,28280 (USD)", RoHS=Yes, Stock 1=17360, Supplier 1=Digi-Key
D5 D6: library part B240-13-F, "DIODES INC. - B240-13-F - Schottky Rectifier, 40 V, 2 A, Single, DO-214AA (SMB), 2 Pins, 500 mV", Average Rectified Current=02:00:00, Capacitance=200pF, Case/Package=SMB, Current=2A, Forward Voltage=500mV, Manufacturer=Diodes, Max Forward Surge Current (Ifsm)=50A, Max Operating Temperature=150°C, Max Repetitive Reverse Voltage (Vrrm)=40V, Max Reverse Current=500uA, Min Operating Temperature=-65°C, Package Quantity=3000, Supplier Part Number 1=B240-FDICT-ND, Category="Schottky Diodes", Component=12, ComponentLink1Description=https://datasheet.ciiva.com/913/ds13004-913158.pdf?src-supplier=Digi-Key, ComponentLink1URL=https://datasheet.ciiva.com/913/ds13004-913158.pdf?src-supplier=Digi-Key, ComponentLink2Description=https://datasheet.ciiva.com/16201/ds13004-16201032.pdf?src-supplier=Future+Electronics, ComponentLink2URL=https://datasheet.ciiva.com/16201/ds13004-16201032.pdf?src-supplier=Future+Electronics, ComponentLink3Description=https://datasheet.ciiva.com/15144/getdatasheetpartid-91432-15144684.pdf?src-supplier=Verical, ComponentLink3URL=https://datasheet.ciiva.com/15144/getdatasheetpartid-91432-15144684.pdf?src-supplier=Verical, Contact Plating=Tin,Matte, Current Rating=2A, Element Configuration=Single, Forward Current=02:00:00, Height=2.62mm, Lead Free="Lead Free", Length=4.57mm, Manufacturer Part Number=B240-13-F, Max Reverse Voltage (DC)=40V, Mount="Surface Mount", Number of Contacts=0, Number of Elements=0, Number of Pins=2, Number of Positions=0, Number of Rows=0, Number of Unidirectional Channels=0, Output Current=02:00:00, Packaging="Tape and Reel", Peak Non-Repetitive Surge Current=50A, Polarity=Standard, Pricing 1="1=0,41000, 10=0,30800, 100=0,14650, 500=0,12978, 1000=0,10100 (USD)", Radiation Hardening=No, REACH SVHC="No SVHC", RoHS=Yes, Stock 1=76580, Supplier 1=Digi-Key, Termination=SMD/SMT, Voltage=40V, Voltage Rating (DC)=40V, Weight=0.00328oz, Width=3.94mm
D8: library part BZX84B5V1LT1G, "Diode Zener Single 5.1V 2% 300mW 3-Pin SOT-23 T/R", Case/Package=SOT-23-3, Forward Voltage=900mV, Manufacturer="ON Semiconductor", Max Operating Temperature=150°C, Max Power Dissipation=225mW, Max Reverse Current=2uA, Min Operating Temperature=-65°C, Package Quantity=3000, Power Dissipation=300mW, Supplier Part Number 1=BZX84B5V1LT1GOSCT-ND, Test Current=5mA, Tolerance=2%, Voltage Rating (DC)=5.1V, Zener Current=10mA, Category="Zener Diodes", Component=9, ComponentLink1Description=https://datasheet.ciiva.com/15142/getdatasheetpartid-38799-15142007.pdf?src-supplier=Verical, ComponentLink1URL=https://datasheet.ciiva.com/15142/getdatasheetpartid-38799-15142007.pdf?src-supplier=Verical, ComponentLink2Description=https://datasheet.ciiva.com/894/bzx84c2v4lt1-d-894869.pdf?src-supplier=Digi-Key, ComponentLink2URL=https://datasheet.ciiva.com/894/bzx84c2v4lt1-d-894869.pdf?src-supplier=Digi-Key, ComponentLink3Description=https://datasheet.ciiva.com/16542/bzx84c2v4lt1-d-16542005.pdf?src-supplier=Avnet+Asia, ComponentLink3URL=https://datasheet.ciiva.com/16542/bzx84c2v4lt1-d-16542005.pdf?src-supplier=Avnet+Asia, ComponentLink4Description=https://datasheet.ciiva.com/894/bzx84c2v4lt1-d-894870.pdf?src-supplier=Digi-Key, ComponentLink4URL=https://datasheet.ciiva.com/894/bzx84c2v4lt1-d-894870.pdf?src-supplier=Digi-Key, ComponentLink5Description=https://datasheet.ciiva.com/10637/bzx84c2v4lt1-d-10637782.pdf?src-supplier=Avnet, ComponentLink5URL=https://datasheet.ciiva.com/10637/bzx84c2v4lt1-d-10637782.pdf?src-supplier=Avnet, ComponentLink6Description=https://datasheet.ciiva.com/894/bzx84c2v4lt1-d-894871.pdf?src-supplier=Digi-Key, ComponentLink6URL=https://datasheet.ciiva.com/894/bzx84c2v4lt1-d-894871.pdf?src-supplier=Digi-Key, ComponentLink7Description=https://datasheet.ciiva.com/16419/bzx84c2v4lt1-d-16419770.pdf?src-supplier=Future+Electronics, ComponentLink7URL=https://datasheet.ciiva.com/16419/bzx84c2v4lt1-d-16419770.pdf?src-supplier=Future+Electronics, ComponentLink8Description=https://datasheet.ciiva.com/26092/bzx84c2v4lt1-d-26092127.pdf?src-supplier=Avnet+Europe, ComponentLink8URL=https://datasheet.ciiva.com/26092/bzx84c2v4lt1-d-26092127.pdf?src-supplier=Avnet+Europe, Contact Plating=Tin,Matte, Element Configuration=Single, ESD Protection=Yes, Halogen Free="Halogen Free", Height=0.94mm, Lead Free="Lead Free", Length=2.9mm, Manufacturer Part Number=BZX84B5V1LT1G, Material=Plastic, Max Reverse Leakage Current=2uA, Number of Contacts=0, Number of Elements=0, Number of Pins=3, Number of Positions=0, Number of Rows=0, Number of Unidirectional Channels=0, Packaging="Tape and Reel", Power Rating=225mW, Pricing 1="1=0,17000, 10=0,14600, 100=0,05620, 500=0,04680, 1000=0,02750 (USD)", Radiation Hardening=No, REACH SVHC="No SVHC", RoHS=Yes, Stock 1=57037, Supplier 1=Digi-Key, Voltage Tolerance=2%, Width=1.3mm, Working Voltage=5.1V, Zener Voltage=5.1V, Impedance=60R
J1 J3 J4 J5: library part 78B03ST, "SWITCH SLIDE DIP SPST 150MA 30V", Current Rating=150mA, Manufacturer=Grayhill, Max Operating Temperature=85°C, Max Voltage Rating (DC)=30V, Min Operating Temperature=-40°C, Supplier Part Number 1=GH7182-ND, Actuator Type="Slide (Standard)", Body Material=Thermoplastic, Category="DIP Switches", Component=4, ComponentLink1Description=https://datasheet.ciiva.com/16405/dip-series-78-spst-4pst-16405784.pdf?src-supplier=Future+Electronics, ComponentLink1URL=https://datasheet.ciiva.com/16405/dip-series-78-spst-4pst-16405784.pdf?src-supplier=Future+Electronics, ComponentLink2Description=https://datasheet.ciiva.com/16198/63dip-series-78-spst-4pst-16198539.pdf?src-supplier=Onlinecomponents.com, ComponentLink2URL=https://datasheet.ciiva.com/16198/63dip-series-78-spst-4pst-16198539.pdf?src-supplier=Onlinecomponents.com, ComponentLink3Description=https://datasheet.ciiva.com/2865/series78dip-2865725.pdf?src-supplier=Digi-Key, ComponentLink3URL=https://datasheet.ciiva.com/2865/series78dip-2865725.pdf?src-supplier=Digi-Key, ComponentLink4Description=https://datasheet.ciiva.com/15219/getdatasheetpartid-174628-15219357.pdf?src-supplier=Verical, ComponentLink4URL=https://datasheet.ciiva.com/15219/getdatasheetpartid-174628-15219357.pdf?src-supplier=Verical, ComponentLink5Description=https://datasheet.ciiva.com/14543/70216689-14543118.pdf?src-supplier=Allied+Electronics, ComponentLink5URL=https://datasheet.ciiva.com/14543/70216689-14543118.pdf?src-supplier=Allied+Electronics, Contact Material="Copper Alloy,Brass,Gold", Contact Plating=Gold, Electrical Life=2000Cycles, Manufacturer Part Number=78B03ST, Mechanical Life=2000Cycles, Mount="Through Hole,PCB", Number of Contacts=0, Number of Elements=0, Number of Positions=0, Number of Rows=0, Number of Unidirectional Channels=0, Orientation=Straight, Packaging=Rail/Tube, Pricing 1="1=1,27000, 10=1,22500, 25=1,15160, 100=0,99470, 250=0,90652, 500=0,84280, 1000=0,78400, 2500=0,71050, 5000=0,66150 (USD)", RoHS=Yes, Stock 1=495, Supplier 1=Digi-Key, Termination="PC Pins", Throw Configuration=SPST, Voltage Rating (DC)=30V
L1: library part IHLP2525CZER4R7M01, "Inductor Power Shielded Wirewound 4.7uH 20% 100KHz 5.5A 40mOhm DCR 2525 T/R", Case Code (Metric)=6363, Case Code (Imperial)=2525, Current Rating=5.5A, DC Resistance (DCR)=40mR, Manufacturer="Vishay Dale", Max DC Current=10A, Max Operating Temperature=125°C, Min Operating Temperature=-55°C, Package Quantity=2000, Self Resonant Frequency=5MHz, Supplier Part Number 1=541-1010-1-ND, Test Frequency=100kHz, Tolerance=20%, alan=3, Case/Package=2525, Category="Fixed Inductors", ComponentLink1Description=https://datasheet.ciiva.com/5706/1671361-5706705.pdf?src-supplier=Farnell, ComponentLink1URL=https://datasheet.ciiva.com/5706/1671361-5706705.pdf?src-supplier=Farnell, ComponentLink2Description=https://datasheet.ciiva.com/11798/0900766b8102c934-11798179.pdf?src-supplier=RSComponents, ComponentLink2URL=https://datasheet.ciiva.com/11798/0900766b8102c934-11798179.pdf?src-supplier=RSComponents, ComponentLink3Description=https://datasheet.ciiva.com/26793/ihlp2525czer4r7m01-26793547.pdf?src-supplier=IIIC, ComponentLink3URL=https://datasheet.ciiva.com/26793/ihlp2525czer4r7m01-26793547.pdf?src-supplier=IIIC, ComponentLink4Description=https://datasheet.ciiva.com/17247/lp25cz01-17247205.pdf?src-supplier=Avnet+Europe, ComponentLink4URL=https://datasheet.ciiva.com/17247/lp25cz01-17247205.pdf?src-supplier=Avnet+Europe, ComponentLink5Description=https://datasheet.ciiva.com/16335/lp25cz01-16335799.pdf?src-supplier=Future+Electronics, ComponentLink5URL=https://datasheet.ciiva.com/16335/lp25cz01-16335799.pdf?src-supplier=Future+Electronics, ComponentLink6Description=https://datasheet.ciiva.com/7290/ihlp25cz-7290185.pdf?src-supplier=Newark, ComponentLink6URL=https://datasheet.ciiva.com/7290/ihlp25cz-7290185.pdf?src-supplier=Newark, ComponentLink7Description=https://datasheet.ciiva.com/8495/lp25cz01-8495083.pdf?src-supplier=Avnet, ComponentLink7URL=https://datasheet.ciiva.com/8495/lp25cz01-8495083.pdf?src-supplier=Avnet, ComponentLink8Description=https://datasheet.ciiva.com/16940/70201586-16940508.pdf?src-supplier=Allied+Electronics, ComponentLink8URL=https://datasheet.ciiva.com/16940/70201586-16940508.pdf?src-supplier=Allied+Electronics, ComponentLink9Description=https://datasheet.ciiva.com/26821/getdatasheetpartid-74581-26821228.pdf?src-supplier=Verical, ComponentLink9URL=https://datasheet.ciiva.com/26821/getdatasheetpartid-74581-26821228.pdf?src-supplier=Verical, Contact Plating=Tin,Matte, Core Material=Metal,Composite,Ferrite, Depth=6.72mm, Height=3mm, Height - Seated (Max)=0.118inch, Lead Free="Lead Free", Length=7.24mm, Manufacturer Part Number=IHLP2525CZER4R7M01, Military Standard=Not, Mount="Surface Mount", Number of Pins=2, Packaging="Tape and Reel", Pricing 1="1=1,10000, 10=1,01700, 25=0,93920, 50=0,78260, 100=0,73560, 250=0,65732, 500=0,56340, 1000=0,50080 (USD)", Radiation Hardening=No, REACH SVHC=Unknown, RMS Current (Irms)=5.5A, RoHS=Yes, Saturation Current=10A, Shielding=Shielded, Stock 1=66868, Supplier 1=Digi-Key, Termination=SMD/SMT, Width=0.255inch, Inductance=4.7uH, Inductance Tolerance=20%
LTC3789: library part LTC3789EGN#PBF, "DC DC Cntrlr Dual-OUT Synchronous Boost/Buck Controller 4V to 38V Input Automotive 28-Pin SSOP N", Case/Package=SSOP, Manufacturer="Analog Devices / Linear Technology", Max Frequency=710kHz, Max Operating Temperature=125°C, Max Supply Voltage=38V, Min Operating Temperature=-40°C, Min Supply Voltage=4V, Output Current=20A, Package Quantity=49, Supplier Part Number 1=LTC3789EGN#PBF-ND, Category="Voltage Regulators - Switching", Component=26, ComponentLink1Description=https://datasheet.ciiva.com/14151/ltc3789-eng-ds-14151002.pdf?src-supplier=Distrelec, ComponentLink1URL=https://datasheet.ciiva.com/14151/ltc3789-eng-ds-14151002.pdf?src-supplier=Distrelec, ComponentLink2Description=https://datasheet.ciiva.com/15267/53789fb-15267774.pdf?src-supplier=Arrow+Europe, ComponentLink2URL=https://datasheet.ciiva.com/15267/53789fb-15267774.pdf?src-supplier=Arrow+Europe, ComponentLink3Description=https://datasheet.ciiva.com/26893/ltc3789egn-pbf-26893678.pdf?src-supplier=IIIC, ComponentLink3URL=https://datasheet.ciiva.com/26893/ltc3789egn-pbf-26893678.pdf?src-supplier=IIIC, ComponentLink4Description=https://datasheet.ciiva.com/6192/1865679-6192839.pdf?src-supplier=Farnell, ComponentLink4URL=https://datasheet.ciiva.com/6192/1865679-6192839.pdf?src-supplier=Farnell, ComponentLink5Description=https://datasheet.ciiva.com/7906/1865679-7906007.pdf?src-supplier=Element14, ComponentLink5URL=https://datasheet.ciiva.com/7906/1865679-7906007.pdf?src-supplier=Element14, ComponentLink6Description=https://datasheet.ciiva.com/7906/1511849-7906151.pdf?src-supplier=Element14, ComponentLink6URL=https://datasheet.ciiva.com/7906/1511849-7906151.pdf?src-supplier=Element14, ComponentLink7Description=https://datasheet.ciiva.com/2015/30095-2015247.pdf?src-supplier=Digi-Key, ComponentLink7URL=https://datasheet.ciiva.com/2015/30095-2015247.pdf?src-supplier=Digi-Key, Duty Cycle=98%, Manufacturer Part Number=LTC3789EGN#PBF, Number of Outputs=1, Number of Pins=28, Output Type=Adjustable, Output Voltage=38V, Packaging=Rail/Tube, Pricing 1="1=11,59000, 25=7,69960, 100=6,36480, 250=6,04656, 500=5,90954 (USD)", REACH SVHC="No SVHC", RoHS=Yes, Stock 1=809, Supplier 1=Digi-Key, Switching Frequency=710kHz
P1 P2: "Header, 2-Pin", LatestRevisionDate=17-Jul-2002, LatestRevisionNote="Re-released for DXP Platform.", Publisher="Altium Limited"
P3: "Header, 3-Pin", LatestRevisionDate=17-Jul-2002, LatestRevisionNote="Re-released for DXP Platform.", Publisher="Altium Limited"
Q4: library part SI4840DY-T1-E3, "MOSFET N-CH 40V 10A 8-SOIC", Case/Package=SO, Continuous Drain Current (ID)=10A, Drain to Source Breakdown Voltage=40V, Drain to Source Resistance=9mR, Gate to Source Voltage (Vgs)=20V, Manufacturer="Vishay Siliconix", Max Operating Temperature=150°C, Max Power Dissipation=1.56W, Min Operating Temperature=-55°C, Package Quantity=2500, Supplier Part Number 1=35K3476, Category=MOSFETs, Component=30, ComponentLink1Description=https://datasheet.ciiva.com/945/71188-945204.pdf?src-supplier=Digi-Key, ComponentLink1URL=https://datasheet.ciiva.com/945/71188-945204.pdf?src-supplier=Digi-Key, ComponentLink2Description=https://datasheet.ciiva.com/17084/si4840dy-t1-e3-17084039.pdf?src-supplier=Allied+Electronics, ComponentLink2URL=https://datasheet.ciiva.com/17084/si4840dy-t1-e3-17084039.pdf?src-supplier=Allied+Electronics, ComponentLink3Description=https://datasheet.ciiva.com/26790/si4840dy-t1-e3-26790652.pdf?src-supplier=IIIC, ComponentLink3URL=https://datasheet.ciiva.com/26790/si4840dy-t1-e3-26790652.pdf?src-supplier=IIIC, ComponentLink4Description=https://datasheet.ciiva.com/945/71188-945206.pdf?src-supplier=Digi-Key, ComponentLink4URL=https://datasheet.ciiva.com/945/71188-945206.pdf?src-supplier=Digi-Key, ComponentLink5Description=https://datasheet.ciiva.com/18403/70026069-18403703.pdf?src-supplier=Allied+Electronics, ComponentLink5URL=https://datasheet.ciiva.com/18403/70026069-18403703.pdf?src-supplier=Allied+Electronics, Drain to Source Voltage (Vdss)=40V, Element Configuration=Single, Fall Time=20ns, Height=1.55mm, Lead Free="Lead Free", Length=5mm, Manufacturer Part Number=SI4840DY-T1-E3, Mount="Surface Mount", Number of Channels=1, Number of Elements=1, Number of Pins=8, Packaging="Tape and Reel", Power Dissipation=1.56W, Rds On Max=9mR, Rise Time=10ns, RoHS=Yes, Supplier 1=Newark, Turn-Off Delay Time=50ns, Turn-On Delay Time=15ns, Voltage Rating (DC)=40V, Weight=0.006596oz, Width=4mm
R1 R25 R28 R31 R32: library part RC2012J473AS, "Res Thick Film 0805 47K Ohm 5% 1/8W ±100ppm/°C Molded SMD T/R", Case/Package=0805, Manufacturer=Samsung, Max Operating Temperature=155°C, Min Operating Temperature=-55°C, Power Rating=125mW, Resistance=47kR, Temperature Coefficient=100ppm/°C, Tolerance=5%, Voltage Rating (DC)=150V, Category="Chip SMD Resistors", Component=15, ComponentLink1Description=https://sem.samsung.co.kr/servlet/DownloadServletWS?dir=/kr/product/&num=&fileName=Resistor_General.pdf&src-supplier=Avnet, ComponentLink1URL=https://sem.samsung.co.kr/servlet/DownloadServletWS?dir=/kr/product/&num=&fileName=Resistor_General.pdf&src-supplier=Avnet, ComponentLink2Description=https://sem.samsung.co.kr/servlet/DownloadServletWS?dir=/kr/product/&num=&fileName=Resistor_General.pdf&src-supplier=Avnet+Europe, ComponentLink2URL=https://sem.samsung.co.kr/servlet/DownloadServletWS?dir=/kr/product/&num=&fileName=Resistor_General.pdf&src-supplier=Avnet+Europe, Composition="Thick Film", Contact Plating=Tin, Lead Free="Lead Free", Manufacturer Part Number=RC2012J473AS, Mount="Surface Mount", Number of Contacts=0, Number of Elements=0, Number of Positions=0, Number of Rows=0, Number of Unidirectional Channels=0, RoHS=Yes, Supplier 1=Avnet, Supplier Part Number 1=RC2012J473AS
R2 R18 R20: library part RL1220S-R50-F, "SUSUMU         RL1220S-R50-F             SMD Current Sense Resistor, 0.5 ohm, 0805 [2012 Metric], 250 mW,  1%, RL Series", Case Code (Metric)=2012, Case Code (Imperial)=0805, Manufacturer=Susumu, Max Operating Temperature=125°C, Max Power Dissipation=333mW, Min Operating Temperature=-55°C, Package Quantity=1, Power Rating=250mW, Resistance=500mR, Resistor Type="Thin Film", Supplier Part Number 1=RL12S.50FCT-ND, Temperature Coefficient=200ppm/°C, Tolerance=1%, Voltage Rating (DC)=100V, Case/Package=0805, Category="Chip SMD Resistors", Component=26, ComponentLink1Description=https://datasheet.ciiva.com/2487/rl-data-sheet-2487714.pdf?src-supplier=Digi-Key, ComponentLink1URL=https://datasheet.ciiva.com/2487/rl-data-sheet-2487714.pdf?src-supplier=Digi-Key, ComponentLink2Description=https://datasheet.ciiva.com/2487/rl-data-sheet-2487715.pdf?src-supplier=Digi-Key, ComponentLink2URL=https://datasheet.ciiva.com/2487/rl-data-sheet-2487715.pdf?src-supplier=Digi-Key, ComponentLink3Description=https://datasheet.ciiva.com/2487/rl-data-sheet-2487716.pdf?src-supplier=Digi-Key, ComponentLink3URL=https://datasheet.ciiva.com/2487/rl-data-sheet-2487716.pdf?src-supplier=Digi-Key, ComponentLink4Description=https://datasheet.ciiva.com/12837/e-15-16-12837656.pdf?src-supplier=Mouser, ComponentLink4URL=https://datasheet.ciiva.com/12837/e-15-16-12837656.pdf?src-supplier=Mouser, ComponentLink5Description=https://datasheet.ciiva.com/7984/87305-7984266.pdf?src-supplier=Element14, ComponentLink5URL=https://datasheet.ciiva.com/7984/87305-7984266.pdf?src-supplier=Element14, Height=0.02inch, Lead Free="Lead Free", Length=0.079inch, Manufacturer Part Number=RL1220S-R50-F, Number of Contacts=0, Number of Elements=0, Number of Pins=2, Number of Positions=0, Number of Rows=0, Number of Terminations=2, Number of Unidirectional Channels=0, Packaging="Tape and Reel", Pricing 1="1=0,29000, 10=0,24300, 25=0,17640, 50=0,12780, 100=0,09480, 250=0,07276, 500=0,05734, 1000=0,03969 (USD)", REACH SVHC=Unknown, RoHS=Yes, Stock 1=218491, Supplier 1=Digi-Key, Termination=SMD/SMT, Weight=0.000194oz, Width=0.049inch
R3 R4 R5 R6 R7 R8 R11 R12 R13 R14 R22 R24 R26 R29 R30: library part "RES  56K 1/4W", "Resistor,Metal Glaze,56KOhms,200WV,5+/-% Tol,-200,200ppm-TC,1206-Case ;RoHS Compliant: Yes", Case Code (Metric)=3216, Case Code (Imperial)=1206, Manufacturer="Vishay Dale", Max Operating Temperature=155°C, Max Power Dissipation=250mW, Min Operating Temperature=-55°C, Package Quantity=5000, Resistance=56kR, Supplier Part Number 1=71-CRCW1206J-56K-E3, Temperature Coefficient=200ppm/°C, Tolerance=5%, Voltage Rating=200V, Case/Package=1206, Category="Chip SMD Resistors", Component=2, ComponentLink1Description=https://datasheet.ciiva.com/2496/dcrcwe3-2496448.pdf?src-supplier=Digi-Key, ComponentLink1URL=https://datasheet.ciiva.com/2496/dcrcwe3-2496448.pdf?src-supplier=Digi-Key, ComponentLink2Description=https://datasheet.ciiva.com/2496/dcrcwe3-2496449.pdf?src-supplier=Digi-Key, ComponentLink2URL=https://datasheet.ciiva.com/2496/dcrcwe3-2496449.pdf?src-supplier=Digi-Key, ComponentLink3Description=https://datasheet.ciiva.com/2496/dcrcwe3-2496450.pdf?src-supplier=Digi-Key, ComponentLink3URL=https://datasheet.ciiva.com/2496/dcrcwe3-2496450.pdf?src-supplier=Digi-Key, ComponentLink4Description=https://datasheet.ciiva.com/8999/dcrcwe3-8999045.pdf?src-supplier=Avnet, ComponentLink4URL=https://datasheet.ciiva.com/8999/dcrcwe3-8999045.pdf?src-supplier=Avnet, ComponentLink5Description=https://datasheet.ciiva.com/8999/dcrcwe3-8999051.pdf?src-supplier=Avnet, ComponentLink5URL=https://datasheet.ciiva.com/8999/dcrcwe3-8999051.pdf?src-supplier=Avnet, Composition="Thick Film", Contact Plating=Tin, Depth=1.6mm, Features="Automotive AEC-Q200", Height=0.55mm, Height - Seated (Max)=0.024inch, Lead Free="Lead Free", Length=3.2mm, Manufacturer Part Number="RES  56K 1/4W", Military Standard=Not, Number of Pins=2, Number of Terminations=2, Packaging="Tape and Reel", Power Rating=250mW, Pricing 1="1=0,10000, 10=0,07300, 100=0,02900, 1000=0,01200, 5000=0,00800, 10000=0,00700 (USD)", Radiation Hardening=No, REACH SVHC=Unknown, RoHS=Yes, Stock 1=9995, Supplier 1=Mouser, Voltage Rating (DC)=200V, Weight=0.000353oz, Width=0.063inch, Working Voltage=200V
R9 R10 R21 RFB1: library part CRCW0805270RFKEA, "Resistor; Thick Film; 270 Ohms; 0.125 W; 1%; SMT; 0805; TCR 37 ppm/DegC; Tape and Reel", Case Code (Metric)=2012, Case Code (Imperial)=0805, Manufacturer=Vishay, Max Operating Temperature=155°C, Min Operating Temperature=-55°C, Package Quantity=5000, Power Rating=125mW, Resistance=270R, Resistor Type="Thick Film", Supplier Part Number 1=541-270CCT-ND, Temperature Coefficient=100ppm/°C, Tolerance=1%, Voltage Rating=150V, Case/Package=0805, Category="Chip SMD Resistors", Component=30, ComponentLink1Description=https://datasheet.ciiva.com/11811/0900766b80d98b26-11811341.pdf?src-supplier=RSComponents, ComponentLink1URL=https://datasheet.ciiva.com/11811/0900766b80d98b26-11811341.pdf?src-supplier=RSComponents, ComponentLink2Description=https://datasheet.ciiva.com/5541/dcrcwe3-109170-5541253.pdf?src-supplier=Mouser, ComponentLink2URL=https://datasheet.ciiva.com/5541/dcrcwe3-109170-5541253.pdf?src-supplier=Mouser, ComponentLink3Description=https://datasheet.ciiva.com/16775/70201119-16775622.pdf?src-supplier=Allied+Electronics, ComponentLink3URL=https://datasheet.ciiva.com/16775/70201119-16775622.pdf?src-supplier=Allied+Electronics, ComponentLink4Description=https://datasheet.ciiva.com/8951/dcrcwe3-8951175.pdf?src-supplier=Avnet, ComponentLink4URL=https://datasheet.ciiva.com/8951/dcrcwe3-8951175.pdf?src-supplier=Avnet, ComponentLink5Description=https://datasheet.ciiva.com/8951/dcrcwe3-8951176.pdf?src-supplier=Avnet, ComponentLink5URL=https://datasheet.ciiva.com/8951/dcrcwe3-8951176.pdf?src-supplier=Avnet, ComponentLink6Description=https://datasheet.ciiva.com/17164/dcrcwe3-17164846.pdf?src-supplier=Avnet+Europe, ComponentLink6URL=https://datasheet.ciiva.com/17164/dcrcwe3-17164846.pdf?src-supplier=Avnet+Europe, ComponentLink7Description=https://datasheet.ciiva.com/26317/fld-crcw-e3-data-en-26317342.pdf?src-supplier=Distrelec, ComponentLink7URL=https://datasheet.ciiva.com/26317/fld-crcw-e3-data-en-26317342.pdf?src-supplier=Distrelec, Contact Plating=Tin, Depth=1.25mm, Height=0.45mm, Lead Free="Lead Free", Length=2mm, Manufacturer Part Number=CRCW0805270RFKEA, Military Standard=Not, Mount="Surface Mount", Number of Contacts=0, Number of Elements=0, Number of Positions=0, Number of Rows=0, Number of Unidirectional Channels=0, Packaging="Tape and Reel", Pricing 1="1=0,10000, 10=0,05700, 100=0,02310, 1000=0,01039, 2500=0,00902 (USD)", Radiation Hardening=No, REACH SVHC=Unknown, RoHS=Yes, Stock 1=8827, Supplier 1=Digi-Key, Termination=SMD/SMT, Voltage Rating (DC)=150V, Weight=0.000194oz, Width=1.25mm
RC RFB2: library part ERJ-P06F25R5V, "Res Thick Film 0805 25.5 Ohm 1% 1/4W 300ppm/C Molded SMD Punched Carrier T/R", Case Code (Imperial)=155°C, Case/Package=0805, Manufacturer=Panasonic, Min Operating Temperature=400V, Power Rating1=500mW, Resistance=2mm, Resistance1=25.5R, Resistor Type="Thick Film", Supplier Part Number 1=85Y6938, Temperature Coefficient1=300ppm/°C, Tolerance=0.6mm, Voltage Rating (DC)=2012, Category="Chip SMD Resistors", Component=21, ComponentLink7Description="No SVHC", Composition=https://datasheet.ciiva.com/24032/aoa0000ce4-64075-24032358.pdf?src-supplier=Mouser, Contact Plating=1%, Height=150V, Length="Tape and Reel", Manufacturer Part Number=ERJ-P06F25R5V, Max Power Dissipation=https://datasheet.ciiva.com/22799/1801181-22799275.pdf?src-supplier=Farnell, Military Standard=0805, Mount="Surface Mount", Number of Terminations=https://datasheet.ciiva.com/22799/1801181-22799275.pdf?src-supplier=Farnell, Packaging=https://datasheet.ciiva.com/24032/aoa0000ce4-64075-24032358.pdf?src-supplier=Mouser, Pricing 1="10=0,08600, 25=0,07900, 50=0,07100, 100=0,04800, 250=0,04000, 500=0,03200, 1000=0,02200 (USD)", REACH SVHC=1.2mm, RoHS=Yes, Stock 1=2949, Supplier 1=Newark, Weight=-55°C, Width=5000

## Via types
v1: diameter 1.27, hole 0.711, Top Layer to Bottom Layer, 65 vias
v2: diameter 0.75, hole 0.511, Top Layer to Bottom Layer, 27 vias
v3: diameter 0.635, hole 0.305, Top Layer to Bottom Layer, 3 vias

## Nets (pads, with @x,y where several pads share a name; then routed paths per layer and width w, separated by ;. In a path a pad name is that pad's centre, name@x,y a point inside that pad or via, vN(x,y) a via of type N, cw(c..) or ccw(c..) an arc to the next point about the centre after c; other vN are vias at no path point)
GND: C1.1 C2.1 C3.2 C5.2 C6.2 C9.2 C15.2 C16.1 C18.2 C24.2 C25.2 C26.2 C27.2 CIN1.2 CIN2.2 COUT1.2 COUT2.2 J4.1 J5.1 LTC3789.15 LTC3789.24 Q2.1 Q2.2 Q2.6 Q2.7 Q2.8 Q3.1 Q3.2 Q3.6 Q3.7 Q3.8 Q4.1 Q4.2 Q4.6 Q4.7 Q4.8 Q5.1 Q5.2 Q5.6 Q5.7 Q5.8 R10.1 R18.2 R32.1 | length 83.1
  Top Layer w0.2: C15.2@35.03,39.653 C15.2@35.03,39.878 ; LTC3789.24 46.736,31.496 47.371,30.861 51.392,30.861 52.387,31.856 52.387,32.701 52.57,32.884 LTC3789.15@52.57,33.52
  Top Layer w0.7: v1(30.226,43.18) 30.273,43.133 33.862,43.133 R18.2 34.73,43.085 35.03,42.785 C15.2 ; Q2.6 36.052,50.602 Q2.7 Q2.8 37.347,48.913 37.465,48.795 v1(37.465,48.641) ; Q2.2 Q2.1 37.347,57.622 36.957,58.012 v1(36.957,58.166) ; v1(37.465,63.5) 37.54,63.425 40.185,63.425 C16.1 C2.1 C1.1 45.985,63.362 48.63,63.362 v1(48.641,63.373) ; v1(41.021,50.292) 41.09,50.361 41.09,52.259 41.159,52.328 Q4.7 Q4.6 ; C24.2 46.038,39.295 46.038,37.655 v1(46.101,37.592) ; Q4.2 Q4.1 46.943,52.324 47.008,52.259 47.008,51.29 v1(47.117,51.181) ; Q3.6 53.525,50.958 Q3.7 Q3.8 54.848,50.955 56.106,50.955 v1(56.134,50.927) ; Q3.2 Q3.1 54.84,56.662 56.368,56.662 v1(56.388,56.642) ; C18.2 57.277,38.585 58.819,37.043 58.819,36.685 v1(58.928,36.576) ; Q5.6 61.78,51.212 Q5.7 Q5.8 63.075,51.037 64.026,50.086 64.026,49.766 v1(64.135,49.657) ; v1(62.23,58.674) 62.23,58.52 61.85,58.14 61.85,56.982 Q5.2 Q5.1 ; v1(66.187,48.367) 66.276,48.278 66.276,47.868 67.945,46.199 C27.2 C26.2 67.893,43.128 67.893,40.565 C3.2 ; v1(77.947,46.482) 82.309,46.482 COUT2.2 ; R32.1 86.36,32.523 v1(86.36,35.306) ; COUT1.2 92.513,46.652 92.81,46.355 v1(92.964,46.355)
  other v1: 49.382,30.861
GND_SIGNAL: C7.1 C8.1 C14.2 CC1.1 CC2.1 CF1.1 CSS.2 D8.1 LTC3789.6 P3.3 R21.1 R24.2 R25.2 R31.2 R32.2 RFB2.2 | length 31.5
  Top Layer w0.254: v3(47.244,25.4) 47.244,25.503 47.372,25.631 LTC3789.6
  Top Layer w0.7: v1(30.353,24.13) 30.462,24.239 30.462,25.672 30.687,25.897 RFB2.2 ; v1(30.988,31.75) 33.042,31.75 33.106,31.686 33.106,29.02 CF1.1 33.106,28.892 33.106,26.226 CSS.2 ; CC1.1 37.667,20.394 37.667,18.467 v1(37.719,18.415) ; CC2.1 38.71,28.783 40.837,28.783 v1(40.939,28.885) ; v1(40.513,18.161) 40.667,18.161 40.855,18.349 D8.1 42.487,18.349 42.487,20.538 R31.2 ; v1(46.609,15.875) 46.718,15.984 46.718,17.657 C7.1 ; v1(53.086,25.4) 53.195,25.509 53.448,25.509 54.587,26.648 R25.2 ; v1(54.737,16.129) 54.789,16.181 54.789,17.854 C8.1 ; R32.2 88.022,30.315 88.421,29.916 R24.2 v1(90.424,29.591)
INTVCC: C14.1 C18.1 D4.2 D7.2 LTC3789.21 P1.1 R7.1 R22.1 | length 65.5
  Top Layer w0.3: v1(48.387,36.83) 48.387,35.306 48.642,35.051 LTC3789.21